# EAGLE board no_routing (EAGLE 9.6.2)

Size 160 x 100 mm. Coordinates in mm from the lower left corner, seen from the top.
Outline: 0,0 160,0 160,100 0,100 0,0
Copper layers (1*16): Top 0.035mm / dielectric 1.5mm / Bottom 0.035mm
Design rules "default": minimum track width 6mil, minimum drill 0.35mm, track to track 6mil, track to pad 6mil, pad to pad 6mil, via to via 6mil, smd to smd 6mil, copper to edge 40mil, drill to drill 6mil, minimum pad ring 10mil, minimum via ring 8mil, stop-mask expansion 4mil, vias tented up to drill 0mil, thermal gap 10mil

## Footprints (pad centres in the part's own frame; a part is rotated, then mirrored left to right if it is on the bottom)
ARDUINO_NANO = drill 0.8 square: 1 -20.32,-7.62 | drill 0.8: 2 -17.78,-7.62; 3 -15.24,-7.62; 4 -12.7,-7.62; 5 -10.16,-7.62; 6 -7.62,-7.62; 7 -5.08,-7.62; 8 -2.54,-7.62; 9 0,-7.62; 10 2.54,-7.62; 11 5.08,-7.62; 12 7.62,-7.62; 13 10.16,-7.62; 14 12.7,-7.62; 15 15.24,-7.62; 16 15.24,7.62; 17 12.7,7.62; 18 10.16,7.62; 19 7.62,7.62; 20 5.08,7.62; 21 2.54,7.62; 22 0,7.62; 23 -2.54,7.62; 24 -5.08,7.62; 25 -7.62,7.62; 26 -10.16,7.62; 27 -12.7,7.62; 28 -15.24,7.62; 29 -17.78,7.62; 30 -20.32,7.62 | hole 1.778: -22.86,-7.62; -22.86,7.62; 17.78,7.62; 17.78,-7.62
HDSP-M = drill 0.813 long: 1 -5.08,-7.62; 2 -2.54,-7.62; 3 0,-7.62; 4 2.54,-7.62; 5 5.08,-7.62; 6 5.08,7.62; 7 2.54,7.62; 8 0,7.62; 9 -2.54,7.62; 10 -5.08,7.62
DIL24-3 = drill 0.813 long: 1 -13.97,-3.81; 2 -11.43,-3.81; 3 -8.89,-3.81; 4 -6.35,-3.81; 5 -3.81,-3.81; 6 -1.27,-3.81; 7 1.27,-3.81; 8 3.81,-3.81; 9 6.35,-3.81; 10 8.89,-3.81; 11 11.43,-3.81; 12 13.97,-3.81; 13 13.97,3.81; 14 11.43,3.81; 15 8.89,3.81; 16 6.35,3.81; 17 3.81,3.81; 18 1.27,3.81; 19 -1.27,3.81; 20 -3.81,3.81; 21 -6.35,3.81; 22 -8.89,3.81; 23 -11.43,3.81; 24 -13.97,3.81

## Placement (x,y rotation side)
ARDUINO_NANO  [ARDUINO_NANO]  82.55,58.42 0 top
DIG_0  HD-H103  [HDSP-M]  16.51,87.63 0 top
DIG_1  HD-H103  [HDSP-M]  29.21,87.63 0 top
DIG_2  HD-H103  [HDSP-M]  41.91,87.63 0 top
DIG_3  HD-H103  [HDSP-M]  54.61,87.63 0 top
DIG_4  HD-H103  [HDSP-M]  67.31,87.63 0 top
MAX7219  MAX7219CNG  [DIL24-3]  33.02,57.15 0 top

## Library data of the parts
ARDUINO_NANO = ArduinoNanoV30
DIG_0 DIG_1-DIG_4 = display-hp; OC_FARNELL: unknown; OC_NEWARK: unknown
MAX7219 = maxim; MF: MAXIM; MPN: MAX7219CNG; OC_FARNELL: 1523914; OC_NEWARK: 34C4018

## Nets
GND: ARDUINO_NANO.19
N$1: DIG_1.8 MAX7219.11
N$2: DIG_0.8 MAX7219.2
N$3: DIG_2.8 MAX7219.6
N$4: DIG_3.8 MAX7219.7
N$5: DIG_4.8 MAX7219.3
N$6: DIG_0.7 DIG_1.7 DIG_2.7 DIG_3.7 DIG_4.7 MAX7219.14
N$7: DIG_0.6 DIG_1.6 DIG_2.6 DIG_3.6 DIG_4.6 MAX7219.16
N$8: DIG_0.4 DIG_1.4 DIG_2.4 DIG_3.4 DIG_4.4 MAX7219.20
N$9: DIG_0.2 DIG_1.2 DIG_2.2 DIG_3.2 DIG_4.2 MAX7219.23
N$10: DIG_0.1 DIG_1.1 DIG_2.1 DIG_3.1 DIG_4.1 MAX7219.21
N$11: DIG_0.9 DIG_1.9 DIG_2.9 DIG_3.9 DIG_4.9 MAX7219.15
N$12: DIG_0.10 DIG_1.10 DIG_2.10 DIG_3.10 DIG_4.10 MAX7219.17
N$13: ARDUINO_NANO.28 MAX7219.13
N$14: ARDUINO_NANO.29 MAX7219.12
N$15: ARDUINO_NANO.30 MAX7219.1
N$16: ARDUINO_NANO.14 MAX7219.4 MAX7219.9
N$17: ARDUINO_NANO.12 MAX7219.19
N$18: MAX7219.18
VIN: ARDUINO_NANO.15

## Tracks (layer width: path | path; a pad name or v marks a point on that pad's centre or on a via)
N$1  (1 unrouted)
N$2  (1 unrouted)
N$3  (1 unrouted)
N$4  (1 unrouted)
N$5  (1 unrouted)
N$6  (5 unrouted)
N$7  (5 unrouted)
N$8  (5 unrouted)
N$9  (5 unrouted)
N$10  (5 unrouted)
N$11  (5 unrouted)
N$12  (5 unrouted)
N$13  (1 unrouted)
N$14  (1 unrouted)
N$15  (1 unrouted)
N$16  (2 unrouted)
N$17  (1 unrouted)